# Altium PCB OSD19001_BRK_X2.PcbDoc (part 1 of 2)
Units mil, origin at the board's own origin, x right, y up, seen from the top; angles counter-clockwise.
Board outline 1800 x 3000 mil, 4 copper layers (Top Layer, L2 PLANE, L3 PLANE, Bottom Layer), stack 59.2 mil thick; 162 components, 155 nets, 549 pads, 163 vias.
Unrouted connection lines stored in the file: 111.
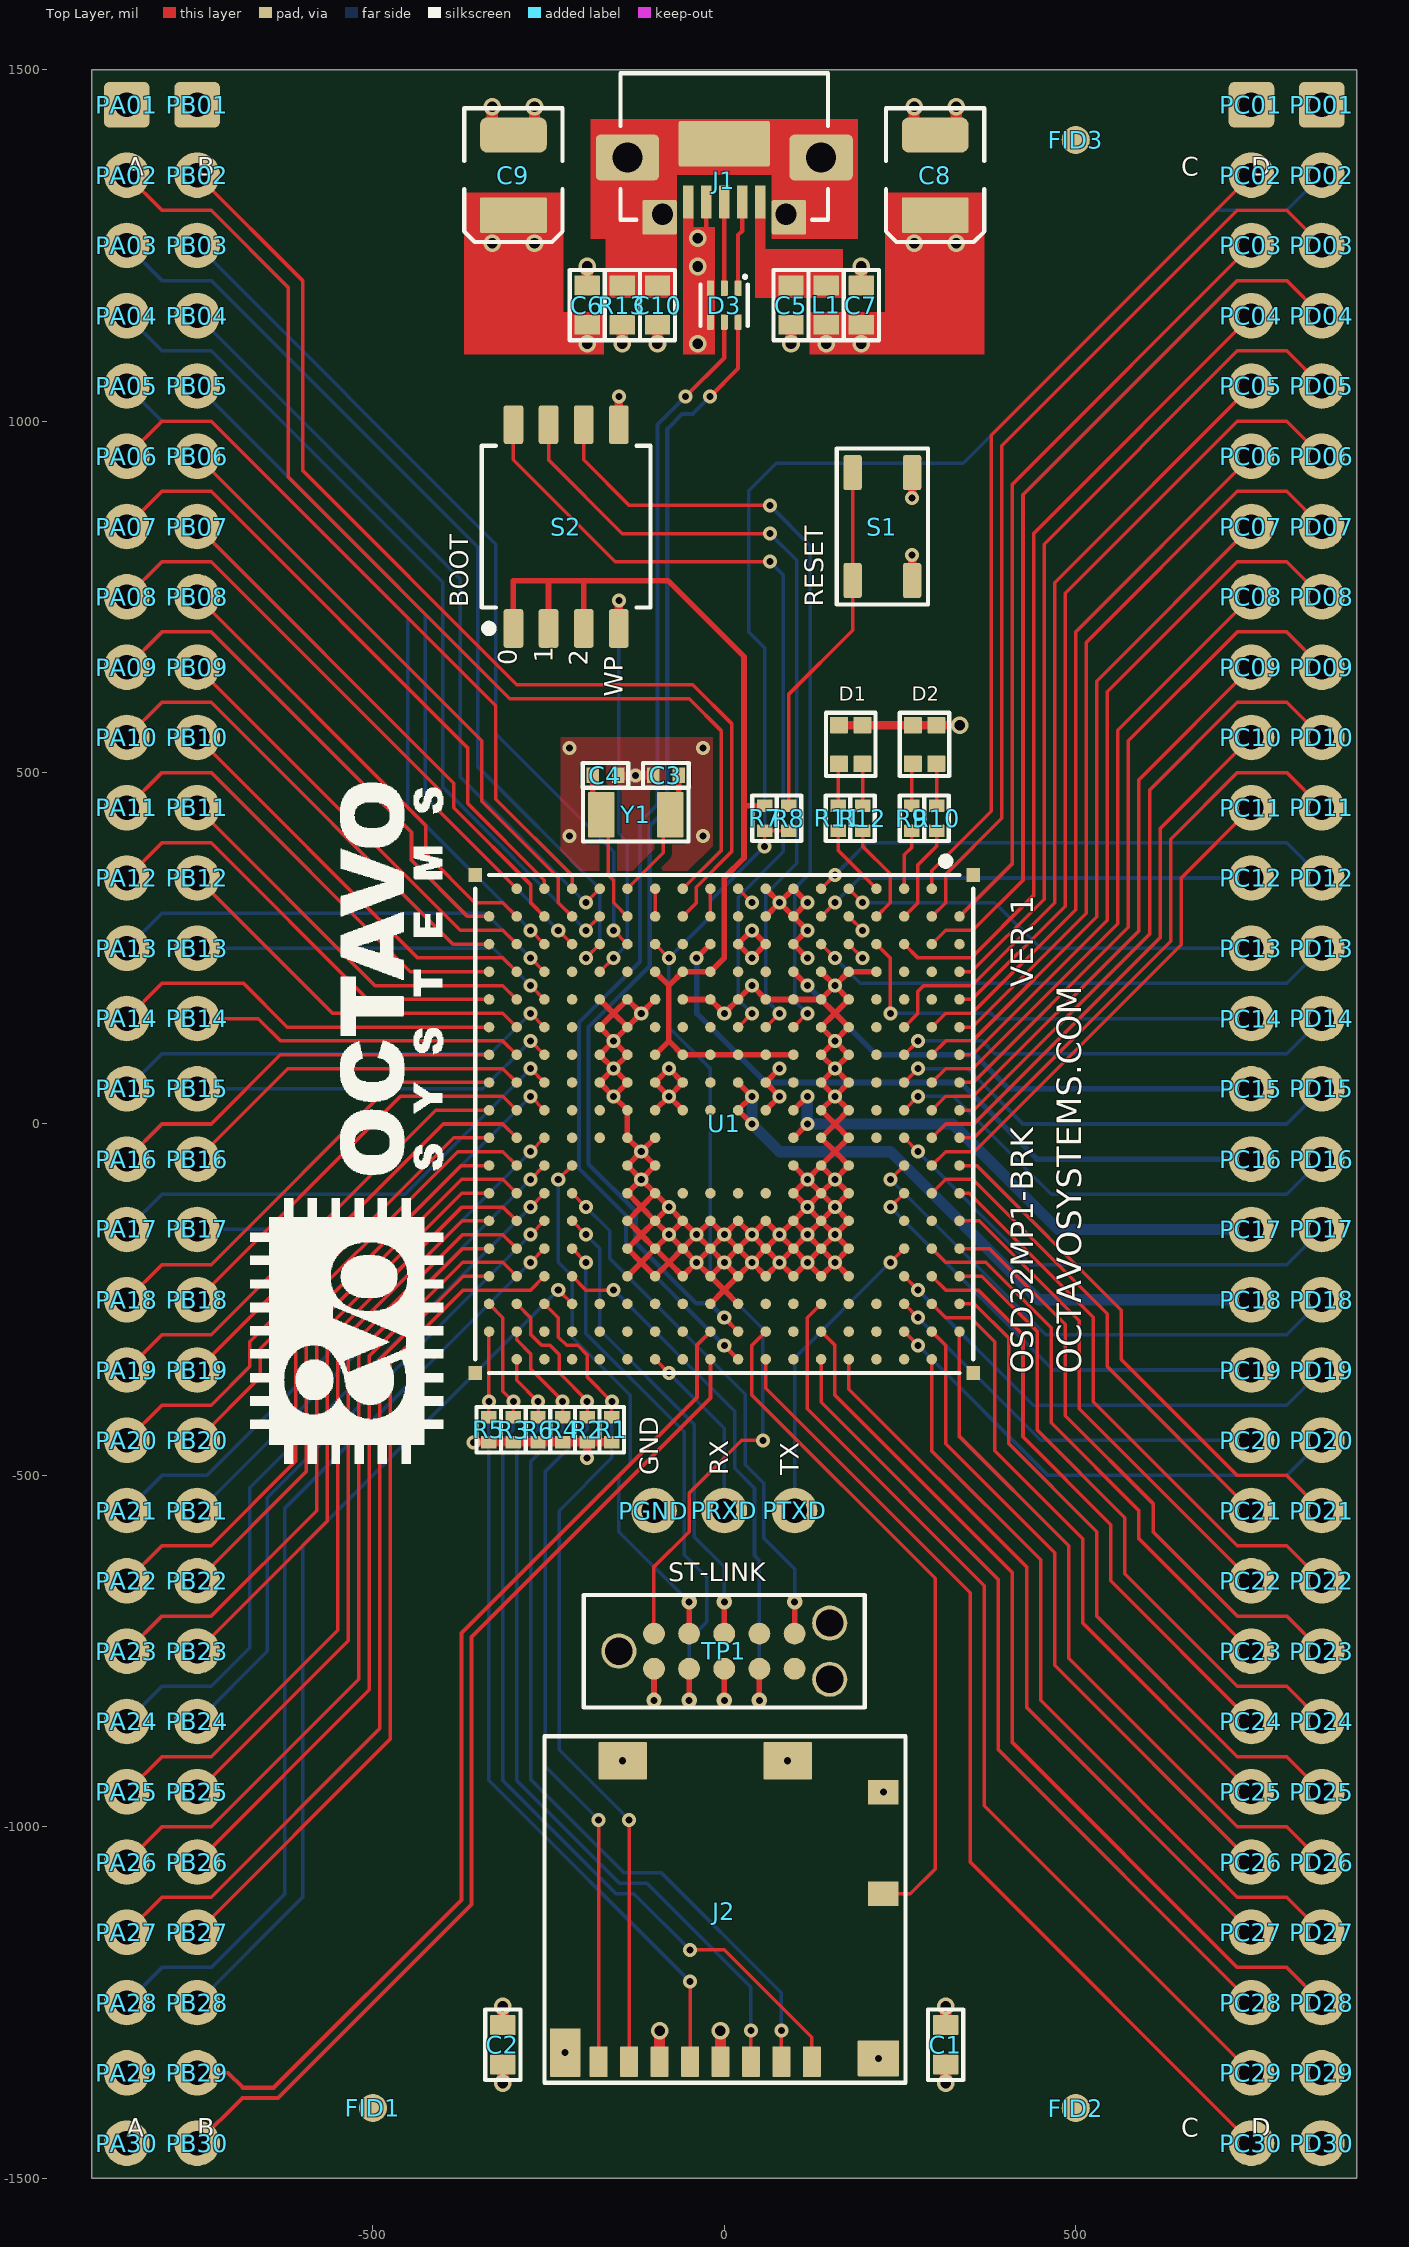
[diagram p0: Top Layer view]
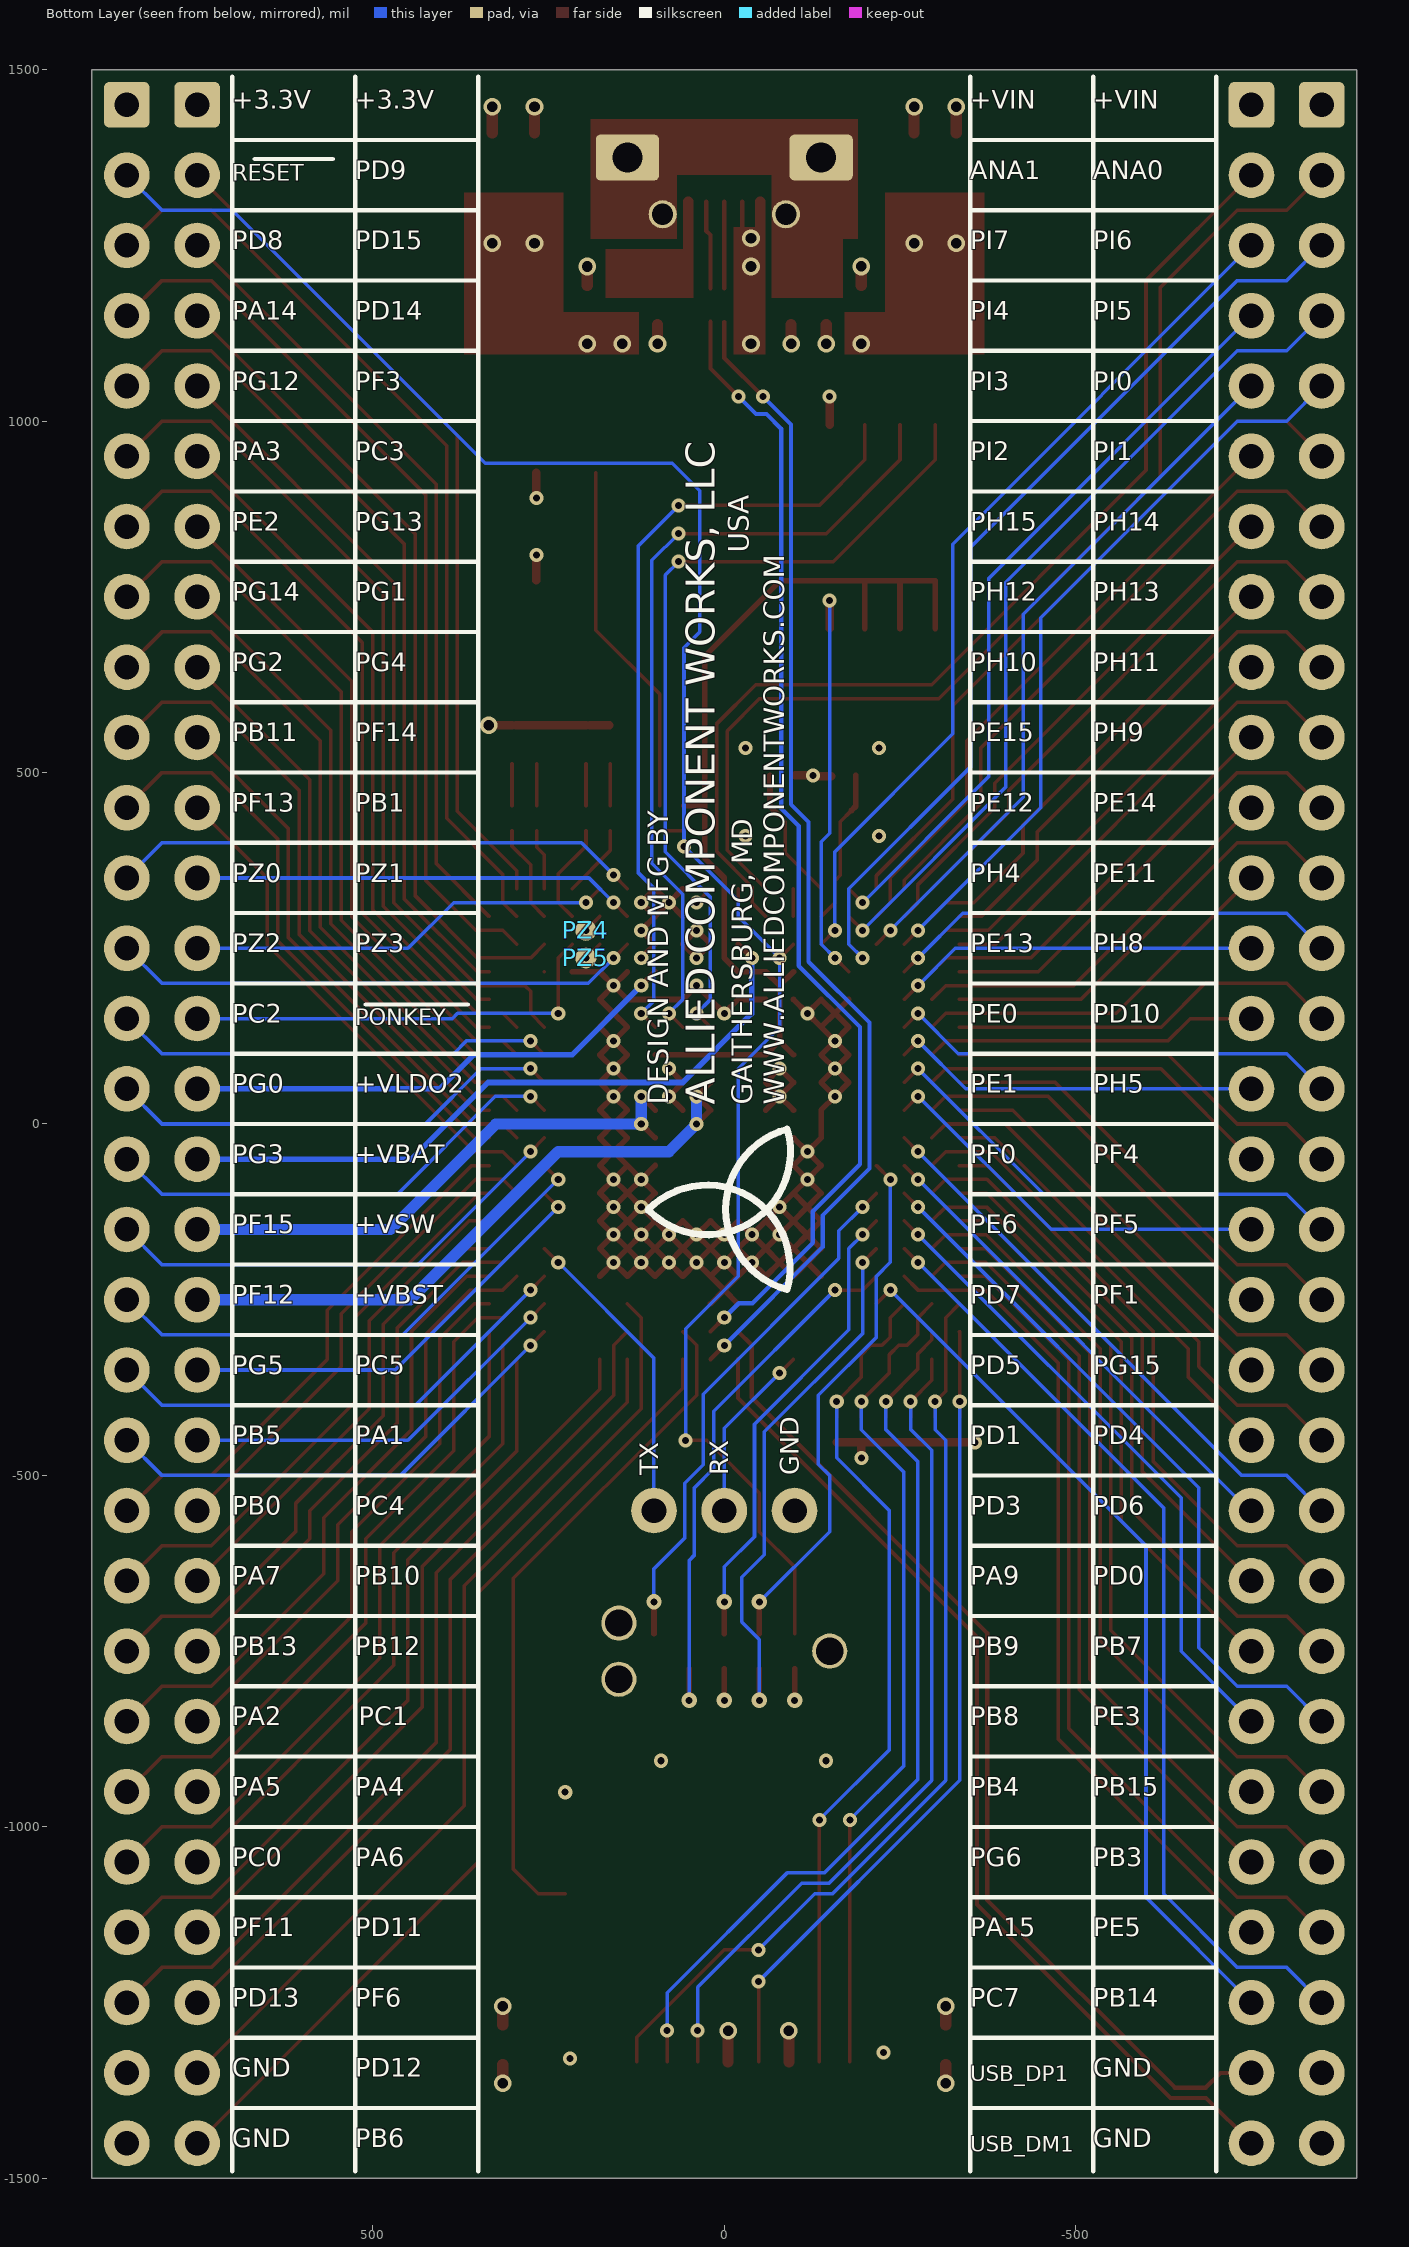
[diagram p1: Bottom Layer view, seen from below]
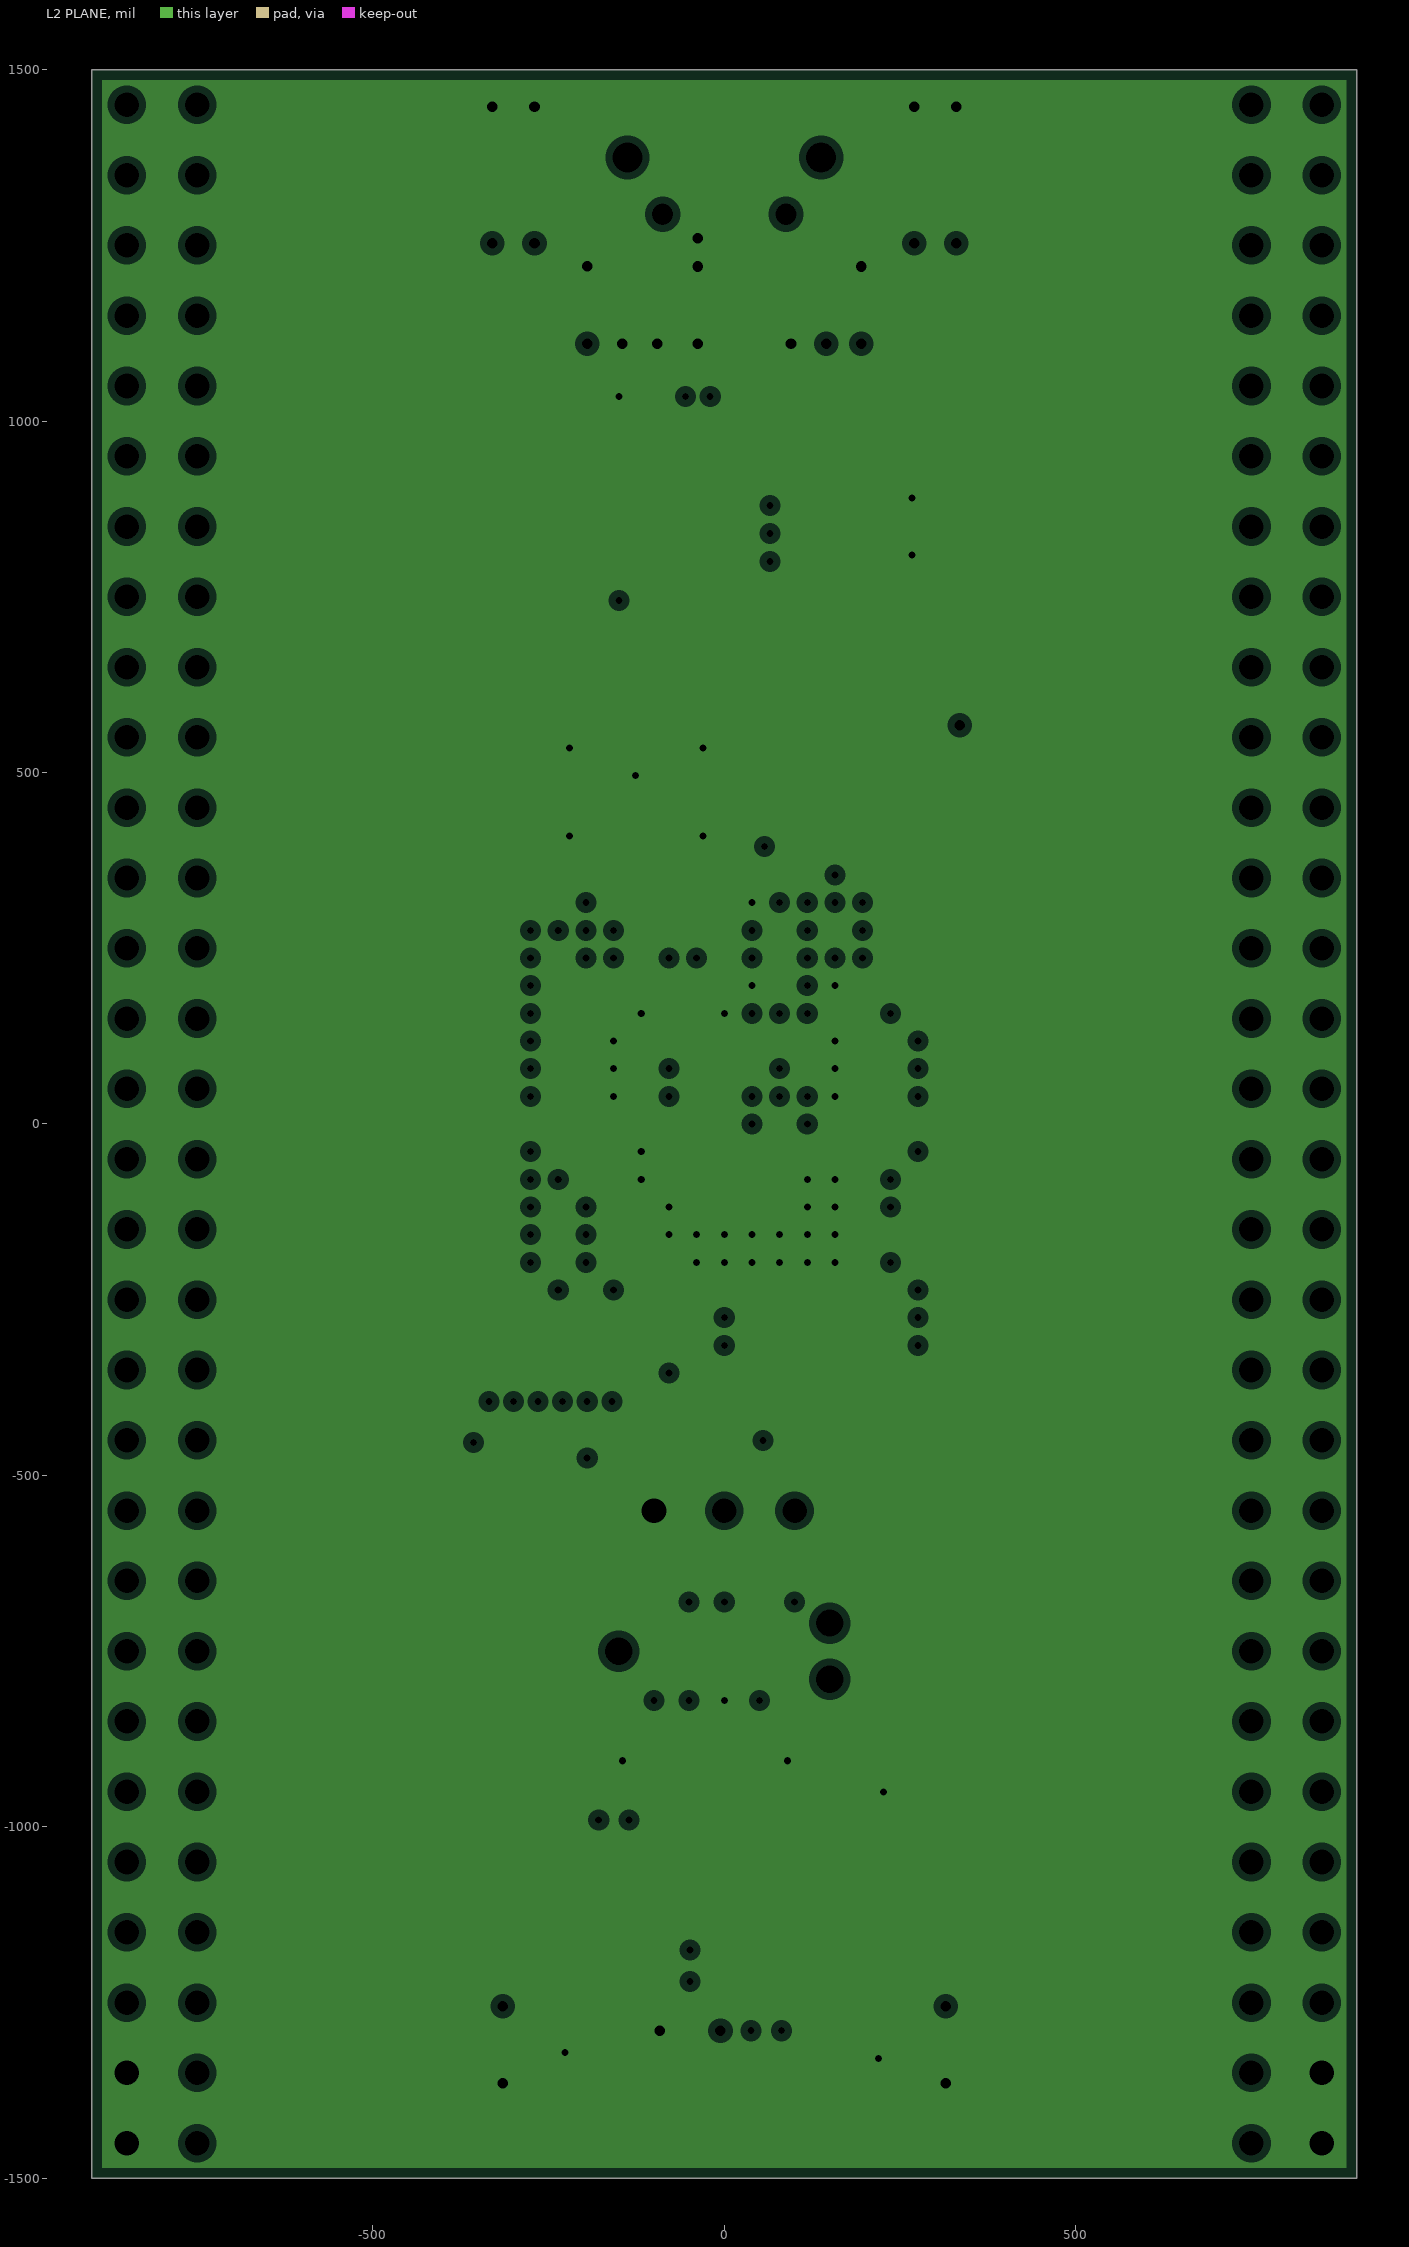
[diagram p2: L2 PLANE, clearances drawn from the general rule]
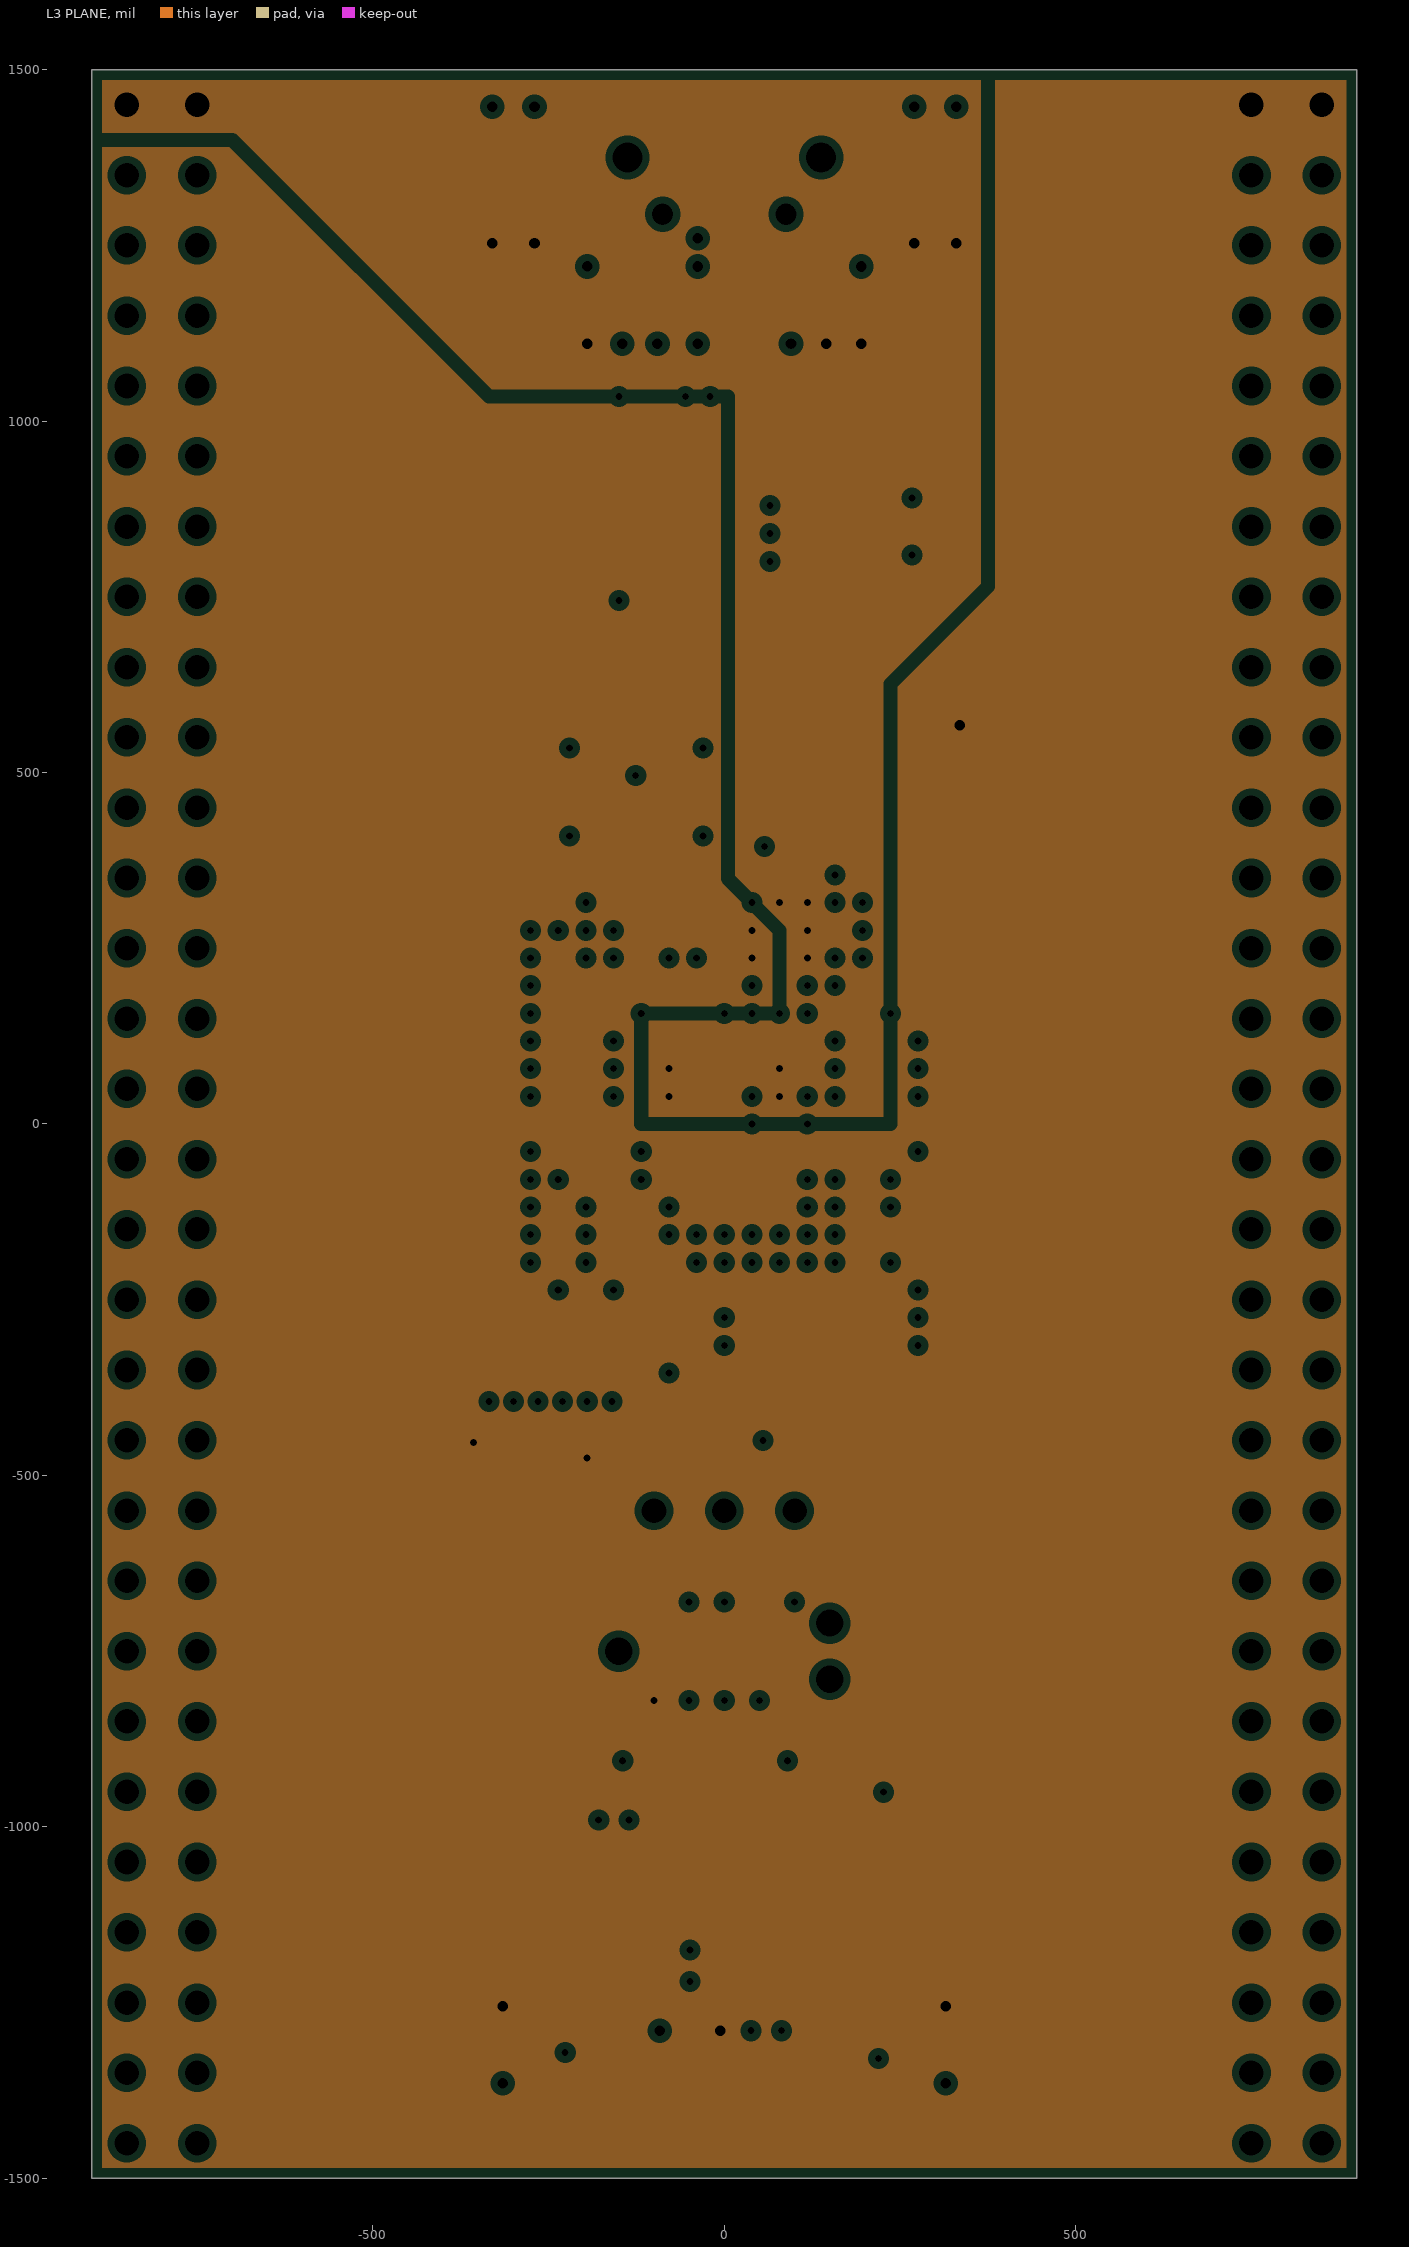
[diagram p3: L3 PLANE, clearances drawn from the general rule]

## Layer stack, top to bottom
Top Solder: solder mask 0.7, Solder Resist, Dk 3.5
Top Layer: signal copper 1.4
Dielectric 1: core 8, IPC-4101/126, Dk 4.2
L2 PLANE: plane copper 0.7, net GND
Dielectric 2: prepreg 39, IPC-4101/126, Dk 4.2
L3 PLANE: plane copper 0.7, net (Multiple Nets)
Dielectric 3: core 8, IPC-4101/126, Dk 4.2
Bottom Layer: signal copper 1.4
Bottom Solder: solder mask 0.7, Solder Resist, Dk 3.5

## Board outline
-900,-1500 900,-1500 900,1500 -900,1500

## Design rules (kind name [scope] priority, off if disabled: settings)
Clearance Polygon [All vs InPoly] p1: gap=10 ignorepadtopadclearanceinfootprint=FALSE
Clearance [All] p2: gap=5 ignorepadtopadclearanceinfootprint=FALSE
DiffPairsRouting [All] p1: maxlimit=200 minlimit=5 mostfreqgap=8 toplayer_minwidth=5 toplayer_maxwidth=12 toplayer_prefwidth=5 bottomlayer_minwidth=5 bottomlayer_maxwidth=12 bottomlayer_prefwidth=5 maxuncoupledlength=500
HoleSize [All] p1: absolutevalues=TRUE maxlimit=250 minlimit=4 maxpercent=80.000 minpercent=20.000
MinimumSolderMaskSliver [All] p1: minsoldermaskwidth=0
PlaneClearance [All] p1: clearance=10
PlaneConnect [IsPad] p1: planeconnectstyle=Direct reliefexpansion=7 reliefentries=4 reliefconductorwidth=10 reliefairgap=5
PlaneConnect Vias [All] p2: planeconnectstyle=Direct reliefexpansion=20 reliefentries=4 reliefconductorwidth=10 reliefairgap=10
PolygonConnect [All] p1: connectstyle=Direct reliefconductorwidth=15 reliefentries=4 polygonreliefangle="45 Angle" airgapwidth=15
RoutingVias [All] p1: holewidth=6 width=15 viastyle="Through Hole" minholewidth=6 minwidth=15 maxholewidth=50 maxwidth=80
SilkToSilkClearance [All] p1: silktosilkclearance=0
SilkToSolderMaskClearance SilkscreenOverComponentPads [IsPad] p1: minsilkscreentomaskgap=0 clearancetoexposedcopper=TRUE
SolderMaskExpansion ViaTenting [IsVia] p1: expansion=-50 istentingtop=FALSE
SolderMaskExpansion [All] p2: expansion=2 istentingtop=FALSE
Width [All] p1: maxlimit=500 minlimit=5 preferedwidth=6
23 further rules are at their usual default settings.

## Classes and differential pairs
component class SH_OSD19001_USB: C5 C6 C7 C8 C9 C10 D3 J1 L1 R13
component class SH_OSD19001_CORE: C1 C2 C3 C4 FID1 FID2 FID3 R7 R8 S1 S2 TP1 Y1
component class SH_OSD19001_BREAKOUTS: D1 D2 J2 PA01 PA02 PA03 PA04 PA05 PA06 PA07 PA08 PA09 PA10 PA11 PA12 PA13 PA14 PA15 PA16 PA17 PA18 PA19 PA20 PA21 PA22 PA23 PA24 PA25 PA26 PA27 PA28 PA29 PA30 PB01 PB02 PB03 PB04 PB05 PB06 PB07 PB08 PB09 PB10 PB11 PB12 PB13 PB14 PB15 PB16 PB17 PB18 PB19 PB20 PB21 PB22 PB23 PB24 PB25 PB26 PB27 PB28 PB29 PB30 PC01 PC02 PC03 PC04 PC05 PC06 PC07 PC08 PC09 PC10 PC11 PC12 PC13 PC14 PC15 PC16 PC17 PC18 PC19 PC20 PC21 PC22 PC23 PC24 PC25 PC26 PC27 PC28 PC29 PC30 PD01 PD02 PD03 PD04 PD05 PD06 PD07 PD08 PD09 PD10 PD11 PD12 PD13 PD14 PD15 PD16 PD17 PD18 PD19 PD20 PD21 PD22 PD23 PD24 PD25 PD26 PD27 PD28 PD29 PD30 PGND PRXD PTXD PZ4 PZ5 R1 R2 R3 R4 R5 R6 R9 R10 R11 R12 U1 U?
differential pair USB2_D: +USB2_D_P -USB2_D_N
differential pair USB1_D: +USB1_D_P -USB1_D_N

## Components (designator, comment, footprint, x,y, rotation, side; value= is the part's Value field where it differs from the comment)
C1 "0.22uF" LP_0603_HIGH#1 315,-1310 r270 top
C2 "0.22uF" LP_0603_HIGH#1 -315,-1310 r270 top
C3 "12pF" LP_0402_HIGH -83,496 r180 top
C4 "12pF" LP_0402_HIGH -169,496 r0 top
C5 "0.22uF" LP_0603_HIGH#2 95,1165 r90 top
C6 "0.22uF" LP_0603_HIGH#2 -195,1165 r270 top
C7 "0.22uF" LP_0603_HIGH#2 195,1165 r270 top
C8 "10uF" LP_EIAB 300,1350 r180 top
C9 "10uF" LP_EIAB -300,1350 r180 top
C10 "0.22uF" LP_0603_HIGH#2 -95,1165 r90 top
D1 "150066SV74000" WURTH_DUAL_0606 180,540 r90 top
D2 "150066SV74000" WURTH_DUAL_0606 285,540 r90 top
D3 "ECMF02-2AMX6" DFN6_6L_ST 0,1165 r270 top
FID1 "FID" FID_ROUND_40_TOP -500,-1400 r90 top
FID2 "FID" FID_ROUND_40_TOP 500,-1400 r90 top
FID3 "FID" FID_ROUND_40_TOP 500,1400 r90 top
J1 "UJ2-MIBH2-4-SMT" CUI_UJ2-MIBH2-4-SMT 0,1375 r0 top
J2 "104031-0811" MOLEX_104031-0811 0,-1120 r0 top locked
L1 "MPZ1608S102ATA00" LP_0603_IND 145,1165 r270 top
PA01 "TP" LP_TESTPOINT_TH#1 -850,1450 r0 top
PA02 "TP" LP_TESTPOINT_TH#2 -850,1350 r90 top
PA03 "TP" LP_TESTPOINT_TH#2 -850,1250 r90 top
PA04 "TP" LP_TESTPOINT_TH#2 -850,1150 r90 top
PA05 "TP" LP_TESTPOINT_TH#2 -850,1050 r90 top
PA06 "TP" LP_TESTPOINT_TH#2 -850,950 r90 top
PA07 "TP" LP_TESTPOINT_TH#2 -850,850 r90 top
PA08 "TP" LP_TESTPOINT_TH#2 -850,750 r90 top
PA09 "TP" LP_TESTPOINT_TH#2 -850,650 r90 top
PA10 "TP" LP_TESTPOINT_TH#2 -850,550 r90 top
PA11 "TP" LP_TESTPOINT_TH#2 -850,450 r0 top
PA12 "TP" LP_TESTPOINT_TH#2 -850,350 r90 top
PA13 "TP" LP_TESTPOINT_TH#2 -850,250 r90 top
PA14 "TP" LP_TESTPOINT_TH#2 -850,150 r90 top
PA15 "TP" LP_TESTPOINT_TH#2 -850,50 r90 top
PA16 "TP" LP_TESTPOINT_TH#2 -850,-50 r90 top
PA17 "TP" LP_TESTPOINT_TH#2 -850,-150 r90 top
PA18 "TP" LP_TESTPOINT_TH#2 -850,-250 r90 top
PA19 "TP" LP_TESTPOINT_TH#2 -850,-350 r90 top
PA20 "TP" LP_TESTPOINT_TH#2 -850,-450 r90 top
PA21 "TP" LP_TESTPOINT_TH#2 -850,-550 r0 top
PA22 "TP" LP_TESTPOINT_TH#2 -850,-650 r90 top
PA23 "TP" LP_TESTPOINT_TH#2 -850,-750 r90 top
PA24 "TP" LP_TESTPOINT_TH#2 -850,-850 r90 top
PA25 "TP" LP_TESTPOINT_TH#2 -850,-950 r90 top
PA26 "TP" LP_TESTPOINT_TH#2 -850,-1050 r90 top
PA27 "TP" LP_TESTPOINT_TH#2 -850,-1150 r90 top
PA28 "TP" LP_TESTPOINT_TH#2 -850,-1250 r90 top
PA29 "TP" LP_TESTPOINT_TH#2 -850,-1350 r90 top
PA30 "TP" LP_TESTPOINT_TH#2 -850,-1450 r90 top
PB01 "TP" LP_TESTPOINT_TH#1 -750,1450 r0 top
PB02 "TP" LP_TESTPOINT_TH#2 -750,1350 r90 top
PB03 "TP" LP_TESTPOINT_TH#2 -750,1250 r90 top
PB04 "TP" LP_TESTPOINT_TH#2 -750,1150 r90 top
PB05 "TP" LP_TESTPOINT_TH#2 -750,1050 r90 top
PB06 "TP" LP_TESTPOINT_TH#2 -750,950 r90 top
PB07 "TP" LP_TESTPOINT_TH#2 -750,850 r90 top
PB08 "TP" LP_TESTPOINT_TH#2 -750,750 r90 top
PB09 "TP" LP_TESTPOINT_TH#2 -750,650 r90 top
PB10 "TP" LP_TESTPOINT_TH#2 -750,550 r90 top
PB11 "TP" LP_TESTPOINT_TH#2 -750,450 r0 top
PB12 "TP" LP_TESTPOINT_TH#2 -750,350 r90 top
PB13 "TP" LP_TESTPOINT_TH#2 -750,250 r90 top
PB14 "TP" LP_TESTPOINT_TH#2 -750,150 r90 top
PB15 "TP" LP_TESTPOINT_TH#2 -750,50 r90 top
PB16 "TP" LP_TESTPOINT_TH#2 -750,-50 r90 top
PB17 "TP" LP_TESTPOINT_TH#2 -750,-150 r90 top
PB18 "TP" LP_TESTPOINT_TH#2 -750,-250 r90 top
PB19 "TP" LP_TESTPOINT_TH#2 -750,-350 r90 top
PB20 "TP" LP_TESTPOINT_TH#2 -750,-450 r90 top
PB21 "TP" LP_TESTPOINT_TH#2 -750,-550 r0 top
PB22 "TP" LP_TESTPOINT_TH#2 -750,-650 r90 top
PB23 "TP" LP_TESTPOINT_TH#2 -750,-750 r90 top
PB24 "TP" LP_TESTPOINT_TH#2 -750,-850 r90 top
PB25 "TP" LP_TESTPOINT_TH#2 -750,-950 r90 top
PB26 "TP" LP_TESTPOINT_TH#2 -750,-1050 r90 top
PB27 "TP" LP_TESTPOINT_TH#2 -750,-1150 r90 top
PB28 "TP" LP_TESTPOINT_TH#2 -750,-1250 r90 top
PB29 "TP" LP_TESTPOINT_TH#2 -750,-1350 r90 top
PB30 "TP" LP_TESTPOINT_TH#2 -750,-1450 r90 top
PC01 "TP" LP_TESTPOINT_TH#1 750,1450 r0 top
PC02 "TP" LP_TESTPOINT_TH#2 750,1350 r90 top
PC03 "TP" LP_TESTPOINT_TH#2 750,1250 r90 top
PC04 "TP" LP_TESTPOINT_TH#2 750,1150 r90 top
PC05 "TP" LP_TESTPOINT_TH#2 750,1050 r90 top
PC06 "TP" LP_TESTPOINT_TH#2 750,950 r90 top
PC07 "TP" LP_TESTPOINT_TH#2 750,850 r90 top
PC08 "TP" LP_TESTPOINT_TH#2 750,750 r90 top
PC09 "TP" LP_TESTPOINT_TH#2 750,650 r90 top
PC10 "TP" LP_TESTPOINT_TH#2 750,550 r90 top
PC11 "TP" LP_TESTPOINT_TH#2 750,450 r0 top
PC12 "TP" LP_TESTPOINT_TH#2 750,350 r90 top
PC13 "TP" LP_TESTPOINT_TH#2 750,250 r90 top
PC14 "TP" LP_TESTPOINT_TH#2 750,150 r90 top
PC15 "TP" LP_TESTPOINT_TH#2 750,50 r90 top
PC16 "TP" LP_TESTPOINT_TH#2 750,-50 r90 top
PC17 "TP" LP_TESTPOINT_TH#2 750,-150 r90 top
PC18 "TP" LP_TESTPOINT_TH#2 750,-250 r90 top
PC19 "TP" LP_TESTPOINT_TH#2 750,-350 r90 top
PC20 "TP" LP_TESTPOINT_TH#2 750,-450 r90 top
PC21 "TP" LP_TESTPOINT_TH#2 750,-550 r0 top
PC22 "TP" LP_TESTPOINT_TH#2 750,-650 r90 top
PC23 "TP" LP_TESTPOINT_TH#2 750,-750 r90 top
PC24 "TP" LP_TESTPOINT_TH#2 750,-850 r90 top
PC25 "TP" LP_TESTPOINT_TH#2 750,-950 r90 top
PC26 "TP" LP_TESTPOINT_TH#2 750,-1050 r90 top
PC27 "TP" LP_TESTPOINT_TH#2 750,-1150 r90 top
PC28 "TP" LP_TESTPOINT_TH#2 750,-1250 r90 top
PC29 "TP" LP_TESTPOINT_TH#2 750,-1350 r90 top
PC30 "TP" LP_TESTPOINT_TH#2 750,-1450 r90 top
PD01 "TP" LP_TESTPOINT_TH#1 850,1450 r0 top
PD02 "TP" LP_TESTPOINT_TH#2 850,1350 r90 top
PD03 "TP" LP_TESTPOINT_TH#2 850,1250 r90 top
PD04 "TP" LP_TESTPOINT_TH#2 850,1150 r90 top
PD05 "TP" LP_TESTPOINT_TH#2 850,1050 r90 top
PD06 "TP" LP_TESTPOINT_TH#2 850,950 r90 top
PD07 "TP" LP_TESTPOINT_TH#2 850,850 r90 top
PD08 "TP" LP_TESTPOINT_TH#2 850,750 r90 top
PD09 "TP" LP_TESTPOINT_TH#2 850,650 r90 top
PD10 "TP" LP_TESTPOINT_TH#2 850,550 r90 top
PD11 "TP" LP_TESTPOINT_TH#2 850,450 r0 top
PD12 "TP" LP_TESTPOINT_TH#2 850,350 r90 top
PD13 "TP" LP_TESTPOINT_TH#2 850,250 r90 top
PD14 "TP" LP_TESTPOINT_TH#2 850,150 r90 top
PD15 "TP" LP_TESTPOINT_TH#2 850,50 r90 top
PD16 "TP" LP_TESTPOINT_TH#2 850,-50 r90 top
PD17 "TP" LP_TESTPOINT_TH#2 850,-150 r90 top
PD18 "TP" LP_TESTPOINT_TH#2 850,-250 r90 top
PD19 "TP" LP_TESTPOINT_TH#2 850,-350 r90 top
PD20 "TP" LP_TESTPOINT_TH#2 850,-450 r90 top
PD21 "TP" LP_TESTPOINT_TH#2 850,-550 r0 top
PD22 "TP" LP_TESTPOINT_TH#2 850,-650 r90 top
PD23 "TP" LP_TESTPOINT_TH#2 850,-750 r90 top
PD24 "TP" LP_TESTPOINT_TH#2 850,-850 r90 top
PD25 "TP" LP_TESTPOINT_TH#2 850,-950 r90 top
PD26 "TP" LP_TESTPOINT_TH#2 850,-1050 r90 top
PD27 "TP" LP_TESTPOINT_TH#2 850,-1150 r90 top
PD28 "TP" LP_TESTPOINT_TH#2 850,-1250 r90 top
PD29 "TP" LP_TESTPOINT_TH#2 850,-1350 r90 top
PD30 "TP" LP_TESTPOINT_TH#2 850,-1450 r90 top
PGND "TP" LP_TESTPOINT_TH#2 -100,-550 r270 top locked
PRXD "TP" LP_TESTPOINT_TH#2 0,-550 r270 top locked
PTXD "TP" LP_TESTPOINT_TH#2 100,-550 r270 top locked
PZ4 "TP" LP_TESTPOINT_SMT 196.85,275.59 r90 bottom
PZ5 "TP" LP_TESTPOINT_SMT 196.85,236.22 r90 bottom
R1 "10K" LP_0402_LOW -160,-435 r270 top
R2 "10K" LP_0402_LOW -195,-435 r270 top
R3 "10K" LP_0402_LOW -300,-435 r270 top
R4 "10K" LP_0402_LOW -230,-435 r270 top
R5 "10K" LP_0402_LOW -335,-435 r270 top
R6 "10K" LP_0402_LOW -265,-435 r270 top
R7 "10K" LP_0402_LOW 57.31,435 r90 top
R8 "330" LP_0402_LOW 92,435 r270 top
R9 "330" LP_0402_LOW 267,435 r90 top
R10 "330" LP_0402_LOW 302,435 r90 top
R11 "330" LP_0402_LOW 162,435 r90 top
R12 "330" LP_0402_LOW 196.73,435 r90 top
R13 "12K" LP_0603_LOW -145,1165 r90 top
S1 "PTS810" C&K_PTS810 225,850 r90 top locked
S2 "TDA04H0SB1R" C&K_TDA04 -225,850 r0 top locked
TP1 "TC2050-IDC-NL" TC2050_SITE_NL 0,-750 r0 top locked
U1 "OSD32MP157C-512M-BAA" BGA_OCTAVO_SIP_OSD32MP157C 0,0 r270 top locked
Y1 "32.768KHz" NDK_CRYSTAL_1.5X3.2 -126,440 r0 top

## Footprints (in the part's own frame and the unit in brackets; to place one, negate y for a bottom-side part, rotate by r counter-clockwise, add the part's x,y. Pads: shape width x height; smd on the part's side, far side on the other; paste and mask are expansions set on the pad)
BGA_OCTAVO_SIP_OSD32MP157C [mm] "BGA For Octavo SIP"
  rect 0.5x0.5 smd paste-0.254: 0(-9,9) 0(-9,-9) 0(9,9) 0(9,-9)
  round 0.381 smd paste+0.025: A2(-7.5,8.5) A3(-6.5,8.5) A4(-5.5,8.5) A5(-4.5,8.5) A6(-3.5,8.5) A7(-2.5,8.5) A8(-1.5,8.5) A9(-0.5,8.5) A10(0.5,8.5) A11(1.5,8.5) A12(2.5,8.5) A13(3.5,8.5) A14(4.5,8.5) A15(5.5,8.5) A16(6.5,8.5) A17(7.5,8.5) B1(-8.5,7.5) B2(-7.5,7.5) B3(-6.5,7.5) B4(-5.5,7.5) B5(-4.5,7.5) B6(-3.5,7.5) B7(-2.5,7.5) B8(-1.5,7.5) B9(-0.5,7.5) B10(0.5,7.5) B11(1.5,7.5) B12(2.5,7.5) B13(3.5,7.5) B14(4.5,7.5) B15(5.5,7.5) B16(6.5,7.5) B17(7.5,7.5) B18(8.5,7.5) C1(-8.5,6.5) C2(-7.5,6.5) C3(-6.5,6.5) C4(-5.5,6.5) C5(-4.5,6.5) C6(-3.5,6.5) C7(-2.5,6.5) C8(-1.5,6.5) C9(-0.5,6.5) C10(0.5,6.5) C11(1.5,6.5) C12(2.5,6.5) C13(3.5,6.5) C14(4.5,6.5) C15(5.5,6.5) C16(6.5,6.5) C17(7.5,6.5) C18(8.5,6.5) D1(-8.5,5.5) D2(-7.5,5.5) D3(-6.5,5.5) D4(-5.5,5.5) D5(-4.5,5.5) D6(-3.5,5.5) D7(-2.5,5.5) D8(-1.5,5.5) D9(-0.5,5.5) D10(0.5,5.5) D16(6.5,5.5) D17(7.5,5.5) D18(8.5,5.5) E1(-8.5,4.5) E2(-7.5,4.5) E3(-6.5,4.5) E4(-5.5,4.5) E5(-4.5,4.5) E6(-3.5,4.5) E7(-2.5,4.5) E8(-1.5,4.5) E9(-0.5,4.5) E10(0.5,4.5) E11(1.5,4.5) E12(2.5,4.5) E13(3.5,4.5) E14(4.5,4.5) E15(5.5,4.5) E16(6.5,4.5) E17(7.5,4.5) E18(8.5,4.5) F1(-8.5,3.5) F2(-7.5,3.5) F3(-6.5,3.5) F4(-5.5,3.5) F5(-4.5,3.5) F6(-3.5,3.5) F7(-2.5,3.5) F8(-1.5,3.5) F9(-0.5,3.5) F10(0.5,3.5) F11(1.5,3.5) F12(2.5,3.5) F13(3.5,3.5) F14(4.5,3.5) F15(5.5,3.5) F16(6.5,3.5) F17(7.5,3.5) F18(8.5,3.5) G1(-8.5,2.5) G2(-7.5,2.5) G3(-6.5,2.5) G4(-5.5,2.5) G5(-4.5,2.5) G6(-3.5,2.5) G7(-2.5,2.5) G8(-1.5,2.5) G9(-0.5,2.5) G10(0.5,2.5) G11(1.5,2.5) G12(2.5,2.5) G13(3.5,2.5) G14(4.5,2.5) G15(5.5,2.5) G16(6.5,2.5) G17(7.5,2.5) G18(8.5,2.5) H1(-8.5,1.5) H2(-7.5,1.5) H3(-6.5,1.5) H4(-5.5,1.5) H5(-4.5,1.5) H6(-3.5,1.5) H7(-2.5,1.5) H8(-1.5,1.5) H9(-0.5,1.5) H12(2.5,1.5) H13(3.5,1.5) H14(4.5,1.5) H15(5.5,1.5) H16(6.5,1.5) H17(7.5,1.5) H18(8.5,1.5) J1(-8.5,0.5) J2(-7.5,0.5) J3(-6.5,0.5) J4(-5.5,0.5) J5(-4.5,0.5) J6(-3.5,0.5) J7(-2.5,0.5) J8(-1.5,0.5) J9(-0.5,0.5) J12(2.5,0.5) J13(3.5,0.5) J14(4.5,0.5) J15(5.5,0.5) J16(6.5,0.5) J17(7.5,0.5) J18(8.5,0.5) K1(-8.5,-0.5) K2(-7.5,-0.5) K3(-6.5,-0.5) K4(-5.5,-0.5) K5(-4.5,-0.5) K6(-3.5,-0.5) K7(-2.5,-0.5) K8(-1.5,-0.5) K9(-0.5,-0.5) K12(2.5,-0.5) K13(3.5,-0.5) K14(4.5,-0.5) K15(5.5,-0.5) K16(6.5,-0.5) K17(7.5,-0.5) K18(8.5,-0.5) L1(-8.5,-1.5) L2(-7.5,-1.5) L3(-6.5,-1.5) L4(-5.5,-1.5) L5(-4.5,-1.5) L6(-3.5,-1.5) L7(-2.5,-1.5) L8(-1.5,-1.5) L9(-0.5,-1.5) L12(2.5,-1.5) L13(3.5,-1.5) L14(4.5,-1.5) L15(5.5,-1.5) L16(6.5,-1.5) L17(7.5,-1.5) L18(8.5,-1.5) M1(-8.5,-2.5) M2(-7.5,-2.5) M3(-6.5,-2.5) M4(-5.5,-2.5) M5(-4.5,-2.5) M6(-3.5,-2.5) M7(-2.5,-2.5) M8(-1.5,-2.5) M9(-0.5,-2.5) M10(0.5,-2.5) M11(1.5,-2.5) M12(2.5,-2.5) M13(3.5,-2.5) M14(4.5,-2.5) M15(5.5,-2.5) M16(6.5,-2.5) M17(7.5,-2.5) M18(8.5,-2.5) N1(-8.5,-3.5) N2(-7.5,-3.5) N3(-6.5,-3.5) N4(-5.5,-3.5) N5(-4.5,-3.5) N6(-3.5,-3.5) N7(-2.5,-3.5) N8(-1.5,-3.5) N9(-0.5,-3.5) N10(0.5,-3.5) N11(1.5,-3.5) N12(2.5,-3.5) N13(3.5,-3.5) N14(4.5,-3.5) N15(5.5,-3.5) N16(6.5,-3.5) N17(7.5,-3.5) N18(8.5,-3.5) P1(-8.5,-4.5) P2(-7.5,-4.5) P3(-6.5,-4.5) P4(-5.5,-4.5) P5(-4.5,-4.5) P6(-3.5,-4.5) P7(-2.5,-4.5) P8(-1.5,-4.5) P9(-0.5,-4.5) P10(0.5,-4.5) P16(6.5,-4.5) P17(7.5,-4.5) P18(8.5,-4.5) R1(-8.5,-5.5) R2(-7.5,-5.5) R3(-6.5,-5.5) R4(-5.5,-5.5) R5(-4.5,-5.5) R6(-3.5,-5.5) R7(-2.5,-5.5) R8(-1.5,-5.5) R9(-0.5,-5.5) R10(0.5,-5.5) R11(1.5,-5.5) R12(2.5,-5.5) R13(3.5,-5.5) R14(4.5,-5.5) R15(5.5,-5.5) R16(6.5,-5.5) R17(7.5,-5.5) R18(8.5,-5.5) T1(-8.5,-6.5) T2(-7.5,-6.5) T3(-6.5,-6.5) T4(-5.5,-6.5) T5(-4.5,-6.5) T6(-3.5,-6.5) T7(-2.5,-6.5) T8(-1.5,-6.5) T9(-0.5,-6.5) T10(0.5,-6.5) T11(1.5,-6.5) T12(2.5,-6.5) T13(3.5,-6.5) T14(4.5,-6.5) T15(5.5,-6.5) T16(6.5,-6.5) T17(7.5,-6.5) T18(8.5,-6.5) U1(-8.5,-7.5) U2(-7.5,-7.5) U3(-6.5,-7.5) U4(-5.5,-7.5) U5(-4.5,-7.5) U6(-3.5,-7.5) U7(-2.5,-7.5) U8(-1.5,-7.5) U9(-0.5,-7.5) U10(0.5,-7.5) U11(1.5,-7.5) U12(2.5,-7.5) U13(3.5,-7.5) U14(4.5,-7.5) U15(5.5,-7.5) U16(6.5,-7.5) U17(7.5,-7.5) U18(8.5,-7.5) V2(-7.5,-8.5) V3(-6.5,-8.5) V4(-5.5,-8.5) V5(-4.5,-8.5) V6(-3.5,-8.5) V7(-2.5,-8.5) V8(-1.5,-8.5) V9(-0.5,-8.5) V10(0.5,-8.5) V11(1.5,-8.5) V12(2.5,-8.5) V13(3.5,-8.5) V14(4.5,-8.5) V15(5.5,-8.5) V16(6.5,-8.5) V17(7.5,-8.5)
  silkscreen extent -9.63,-9 9,9, body extent -9,-9 9,9, height 2.3
C&K_PTS810 [mm] "Tact Switch"
  rrect25% 1.27x0.66 smd: 1(-1.95,1.075) 1(1.95,1.075) 2(-1.95,-1.075) 2(1.95,-1.075)
  silkscreen extent -2.82,-1.65 2.82,1.65, body extent -2.3,-1.6 2.3,1.6, height 2.5
C&K_TDA04 [mil] "SMT Dip Switch, 4 Position"
  rrect25% 28x55 smd: 1(-75,-145) 2(-25,-145) 3(25,-145) 4(75,-145) 5(75,145) 6(25,145) 7(-25,145) 8(-75,145)
  silkscreen extent -120,-150 120,115, body extent -122,-160 122,160, height 93
CUI_UJ2-MIBH2-4-SMT [mil] "Micro USB B"
  rrect10% 15x47 smd: 1(51.18,-62.99) 2(25.59,-62.99) 3(0,-62.99) 4(-25.59,-62.99) 5(-51.18,-62.99)
  rrect20% 90x65 hole 43: 6(-137.8,0) 6(137.8,0)
  rrect10% 49x49 smd mask+1: 6(-92,-85) 6(92,-85)
  round 40 hole 30 mask+0: 6(-87.6,-80.71) 6(87.6,-80.71)
  rrect10% 130x65 smd mask+1: 6(0,19.68)
  silkscreen extent -148,-89 148,120, body extent -148,-88 148,120, height 108
DFN6_6L_ST [mil] "DFN 6-Pin 1.7mm x 1.5mm"
  rrect25% 22x10 smd: 1(-24.02,19.68) 2(-24.02,0) 5(24.02,0) 6(24.02,19.68)
  rrect25% 22x10 smd mask+1: 3(-24.02,-19.68) 4(24.02,-19.68)
  silkscreen extent -42,-34 30,33, body extent -30,-33 30,33, height 20
FID_ROUND_40_TOP [mil] "40 Mil Round Fiducial, Top Side Only"
  round 40 smd: 1(0,0)
LP_0402_HIGH [mil] "0402 Footprint High Component"
  rrect5% 18x22 smd: 1(-18,0)
  rrect5% 18x22 smd mask+1: 2(18,0)
  silkscreen extent -32,-18 32,18, body extent -21,-11 21,11, height 20
LP_0402_LOW [mil] "0402 Footprint Low Component"
  rrect5% 18x22 smd: 1(-18,0) 2(18,0)
  silkscreen extent -32,-18 32,18, body extent -21,-11 21,11, height 10
LP_0603_HIGH#1 [mil] "0603 Footprint High Component"
  rrect5% 28x36 smd: 1(-28,0) 2(28,0)
  silkscreen extent -50,-25 50,25, body extent -33,-17 33,17, height 30
LP_0603_HIGH#2 [mil] "0603 Footprint High Component"
  rrect5% 28x36 smd: 1(-28,0)
  rrect5% 28x36 smd mask+1: 2(28,0)
  silkscreen extent -50,-25 50,25, body extent -33,-17 33,17, height 30
LP_0603_IND [mil] "0603 Footprint High Component"
  rrect5% 28x36 smd mask+1: 1(-28,0) 2(28,0)
  silkscreen extent -50,-25 50,25, body extent -33,-17 33,17, height 30
LP_0603_LOW [mil] "0603 Footprint Low Component"
  rrect5% 28x36 smd: 1(-28,0)
  rrect5% 28x36 smd mask+1: 2(28,0)
  silkscreen extent -50,-25 50,25, body extent -33,-17 33,17, height 15
LP_EIAB [mil] "EIA-B Case Capacitor"
  rrect5% 95x50 smd mask+1: 1(0,57)
  rrect40% 95x50 smd: 2(0,-57)
  silkscreen extent -70,-95 70,95, body extent -59,-73 59,73, height 83
LP_TESTPOINT_SMT [mil] "SMT Test Point"
  round 30 smd: 1(0,0)
LP_TESTPOINT_TH#1 [mil] "35 Mil Test Point Hole"
  rrect25% 65x65 / inner rrect25% 55x55 / far side rrect25% 65x65 hole 35: 1(0,0)
LP_TESTPOINT_TH#2 [mil] "35 Mil Test Point Hole"
  round 65 / inner round 55 / far side round 65 hole 35: 1(0,0)
MOLEX_104031-0811 [mm]
  rrect10% 0.65x1.1 smd paste+0.102: 1(3.163,-5.437) 2(2.063,-5.437) 3(0.962,-5.437) 4(-0.138,-5.437) 5(-1.237,-5.437) 6(-2.337,-5.437) 7(-3.437,-5.437) 8(-4.537,-5.437)
  rrect5% 1.1x1.75 smd paste+0.051: 9(-5.747,-5.11)
  rrect5% 1.75x1.35 smd paste+0.051: 9(-3.67,5.437) 9(2.29,5.437)
  rrect5% 1.5x1.3 smd paste+0.051: 9(5.573,-5.318)
  rrect5% 1.1x0.9 smd paste+0.051: 10(5.748,4.3) 11(5.748,0.63)
  silkscreen extent -6.5,-6.2 6.55,6.32, body extent -5.93,-9.75 6.02,5.62, height 1.55
NDK_CRYSTAL_1.5X3.2 [mil]
  rrect10% 38x65 smd paste-5: 1(-49.21,0) 2(49.21,0)
  silkscreen extent -75,-38 75,38, body extent -63,-30 63,30, height 31
TC2050_SITE_NL [mil]
  round 50 hole 39: 0(-150,0) 0(150,-40) 0(150,40)
  round 31 smd paste-39: 1(-100,-25) 2(-50,-25) 3(0,-25) 4(50,-25) 5(100,-25) 6(100,25) 7(50,25) 8(0,25) 9(-50,25) 10(-100,25)
  silkscreen extent -200,-80 200,80
WURTH_DUAL_0606 [mm] "R/G LED 0606 Package"
  rrect10% 0.6x0.65 smd: 1(-0.7,0.425) 2(-0.7,-0.425) 3(0.7,-0.425) 4(0.7,0.425)
  silkscreen extent -1.14,-0.89 1.14,0.9, body extent -0.8,-0.8 0.8,0.8, height 0.7

## Part data
C1 C2 C3 C4 C5 C6 C7 C10: library part CERCAP, Tolerance=10%, Voltage=25V
C8 C9: library part POLCAP, Tolerance=20%, Voltage=10V
D1 D2: library part LED_DUAL_0606_WURTH, "LED, Dual, 4-Wire, SMT", PartNumber=150066SV74000
D3: "USB Filter And ESD Protection", PartNumber=ECMF02-2AMX6
FID1 FID2 FID3: library part FIDUCIAL
J1: library part USB_MICRO_B, "USB Micro B Connetor", PartNumber=UJ2-MIBH2-4-SMT
J2: library part SD_CARD_SW, "Micro SD Connector, With CD Switch", PartNumber=104031-0811
L1: library part BEAD, CurrentRating=0.8A, Impedence=300, PartNumber=MPZ1608S102ATA00, Size=0603
PA01 PA02 PA03 PA04 PA05 PA06 PA07 PA08 PA09 PA10 PA11 PA12 PA13 PA14 PA15 PA16 PA17 PA18 PA19 PA20 PA21 PA22 PA23 PA24 PA25 PA26 PA27 PA28 PA29 PA30 PB01 PB02 PB03 PB04 PB05 PB06 PB07 PB08 PB09 PB10 PB11 PB12 PB13 PB14 PB15 PB16 PB17 PB18 PB19 PB20 PB21 PB22 PB23 PB24 PB25 PB26 PB27 PB28 PB29 PB30 PC01 PC02 PC03 PC04 PC05 PC06 PC07 PC08 PC09 PC10 PC11 PC12 PC13 PC14 PC15 PC16 PC17 PC18 PC19 PC20 PC21 PC22 PC23 PC24 PC25 PC26 PC27 PC28 PC29 PC30 PD01 PD02 PD03 PD04 PD05 PD06 PD07 PD08 PD09 PD10 PD11 PD12 PD13 PD14 PD15 PD16 PD17 PD18 PD19 PD20 PD21 PD22 PD23 PD24 PD25 PD26 PD27 PD28 PD29 PD30 PGND PRXD PTXD PZ4 PZ5: library part TEST_POINT
R1 R2 R3 R4 R5 R6 R7 R8 R9 R10 R11 R12 R13: library part RESISTOR, Power=0.1W, Tolerance=5%, Voltage=50V
S1: library part TACT_SWITCH, "SPST Tactile Switch, 2 Active Pins", PartNumber=PTS810
S2: library part DIP_SW_4, "Four Position DIP Switch", PartNumber=TDA04H0SB1R
TP1: library part TC2050, "Tag Connect Site, 10-Pin", PartNumber=TC2050-IDC-NL
U1: "Octavo ST Processor SIP", Manufacturer="Octavo Systems", ComponentLink1Description=TBD, ComponentLink1URL=http://TBD, PartNumber=OSD32MP157C-512M-BAA
Y1: library part CRYSTAL_2PIN, "Crystal", PartNumber=NX3215SA-32.768K-STD-MUA-9, Frequency=32.768KHz

## Via types
v1: diameter 20, hole 10, Top Layer to Bottom Layer, 130 vias
v2: diameter 25, hole 15, Top Layer to Bottom Layer, 26 vias
v3: diameter 22, hole 10, Top Layer to Bottom Layer, 7 vias

## Nets (pads, with @x,y where several pads share a name; then routed paths per layer and width w, separated by ;. In a path a pad name is that pad's centre, name@x,y a point inside that pad or via, vN(x,y) a via of type N, cw(c..) or ccw(c..) an arc to the next point about the centre after c; other vN are vias at no path point)
+3.3V: C1.1 C2.1 D1.3 D1.4 D2.3 D2.4 J2.4 PC01.1 PD01.1 R1.2 R2.2 R3.2 R4.2 R5.2 R6.2 TP1.1 U1.H3 U1.J3 | length 640.8
  Top Layer w8: v3(-100,-820) TP1.1@-100,-775 ; U1.J3@19.69,255.91 v1(39.37,236.22) U1.H3@59.06,255.91 v1(39.37,275.59) U1.J3@19.69,255.91
  Top Layer w12: v1(-357,-453) R5.2@-335,-453 R3.2@-300,-453 R6.2@-265,-453 R4.2@-230,-453 R2.2@-195,-453 ; v1(-195,-475) R2.2@-195,-453 ; R1.2@-160,-453 R2.2@-195,-453 ; D1.4@163.27,567.56 D1.3@191.54,567.56 ; D1.3@196.73,567.56 D2.4@268.27,567.56 D2.3@296.54,567.56 ; D2.3@301.73,567.56 v2(335,567.56)
  Top Layer w16: C2.1@-314.96,-1281.96 v2@-314.96,-1251.97 ; J2.4@-5.41,-1334.07 v2(-5.41,-1290) ; C1.1@315.08,-1281.92 v2@315.08,-1251.93
  other v2: -314.96,-1255 315.08,-1254.96
+VBAT: PC16.1 U1.K3 | length 981.9
  Top Layer w8: v1(-39.37,236.22) U1.K3@-19.69,255.91
  Bottom Layer w8: v1(-39.37,236.22) -39,235.85 -39,157.11 59.06,59.06 335.94,59.06 445,-50 PC16.1@750,-50
+VBST: PC18.1 U1.J8 U1.J9 | length 937.1
  Top Layer w8: U1.J8@19.69,59.06 v1(39.37,39.37) U1.J9@19.69,19.69 v1(39.37,0)
  Bottom Layer w16: v1(39.37,39.37) v1(39.37,0) 78.74,-39.37 236.22,-39.37 446.85,-250 PC18.1@750,-250
+VIN: C6.2 C7.2 C8.1 C9.1 L1.2 PA01.1 PB01.1 U1.G1 U1.G2 U1.G3 U1.H1 U1.H2 U1.H8 U1.H9 U1.L8 U1.L9 U1.M8 U1.M9 | length 751.2
  Top Layer w8: U1.M9@-98.43,19.69 v1(-78.74,39.37) ; U1.L9@-59.06,19.69 v1(-78.74,39.37) ; U1.H9@59.06,19.69 v1(78.74,39.37) U1.H8@59.06,59.06 v1(78.74,78.74) ; U1.H2@59.06,295.28 v1(78.74,314.96) ; U1.H1@59.06,334.65 v1(78.74,314.96) ; v1(118.11,236.22) U1.G3@98.43,255.91 v1(118.11,275.59) U1.G2@98.43,295.28 ; v1(-78.74,39.37) U1.M8@-98.43,59.06 v1(-78.74,78.74) U1.L8@-59.06,59.06 v1(-78.74,39.37) ; v1(78.74,314.96) U1.G1@98.43,334.65 v1(118.11,314.96) U1.G2@98.43,295.28 ; v1(78.74,314.96) U1.G2@98.43,295.28
  Top Layer w16: v2@-330,1249.97 C9.1@-330,1290 ; v2@-270,1249.97 C9.1@-270,1290 ; v2@-195,1107.01 C6.2@-195,1137 ; v2@144.96,1106.97 L1.2@144.96,1136.96 ; v2@194.96,1106.97 C7.2@194.96,1136.96 ; v2@270,1249.97 C8.1@270,1290 ; v2@330,1249.97 C8.1@330,1290
  other v2: -195,1110.04 144.96,1110 194.96,1110 -330,1253 -270,1253 270,1253 330,1253
+VLDO2: PC15.1 U1.G4 | length 720.6
  Top Layer w8: U1.G4@98.43,216.54 v1(118.11,196.85)
  Bottom Layer w8: v1(118.11,196.85) 216.54,98.43 356.57,98.43 405,50 PC15.1@750,50
+VSW: PC17.1 U1.G9 U1.G10 | length 789.1
  Top Layer w8: U1.G10@98.43,-19.69 v1(118.11,0) ; U1.G9@98.43,19.69 v1(118.11,39.37)
  Bottom Layer w16: v1(118.11,39.37) v1(118.11,0) 325,0 475,-150 PC17.1@750,-150
\LED1_GRN: R12.1 U1.D2 | length 146.2
  Top Layer w5: R12.1@196.73,417 196.73,395.27 236.22,355.78 236.22,314.96 U1.D2@216.54,295.28
\LED1_RED: R11.1 U1.D1 | length 104.9
  Top Layer w5: R11.1@162,417 162,389.18 U1.D1@216.54,334.65
\LED2_GRN: R10.1 U1.C2 | length 140.8
  Top Layer w5: U1.C2@255.91,295.28 275.59,314.96 275.59,368.59 302,395 R10.1@302,417
\LED2_RED: R9.1 U1.C1 | length 86.9
  Top Layer w5: U1.C1@255.91,334.65 255.91,382.91 267,394 R9.1@267,417
\PONKEY: PC14.1 U1.D3 | length 623.5
  Top Layer w5: U1.D3@216.54,255.91 236.22,236.22 v1(236.22,157.48)
  Bottom Layer w5: v1(236.22,157.48) 379.52,157.48 387,150 PC14.1@750,150
\RESET: PD02.1 R7.1 R8.2 TP1.10 U1.M3 | length 2914.3
  Top Layer w5: TP1.10@-100,-725 -100,-630 -50,-580 -50,-525 25,-450 v1(55,-450) ; U1.M3@-98.43,255.91 v1(-78.74,236.22) ; v1(57.31,395) R7.1@57.31,417 R8.2@92,417
  Bottom Layer w5: v1(55,-450) 55,-291.22 -19.68,-216.54 -19.68,78.74 -78.74,137.8 v1(-78.74,236.22) -19.68,295.28 -19.68,318.01 v1(57.31,395) 57.31,677.69 35,700 35,901 74,940 340,940 700,1300 800,1300 PD02.1@850,1350
\SDDET: J2.11 U1.H17 | length 969.1
  Top Layer w5: U1.H17@59.06,-295.28 39.37,-314.96 39.37,-385.83 300,-646.46 300,-1060 264.8,-1095.2 J2.11@226.28,-1095.2
\TRST: TP1.9 U1.R11 | length 764.6
  Top Layer w5: v1(-236.22,-78.74) U1.R11@-216.54,-59.06
  Top Layer w8: TP1.9@-50,-725 v3(-50,-680)
  Bottom Layer w5: v1(-236.22,-78.74) -236.22,-196.85 -216.54,-216.54 -216.54,-303.46 -133.86,-386.14 -133.86,-483.86 -150,-500 -150,-580 v3(-50,-680)
ANA0: PA02.1 U1.L1 | length 1579
  Top Layer w5: PA02.1@-850,1350 -800,1300 -730,1300 -620,1190 -620,920 -305,605 -49.88,605 -4,559.12 -4,389.7 U1.L1@-59.06,334.65
ANA1: PB02.1 U1.L2 | length 1545.4
  Top Layer w5: PB02.1@-750,1350 -600,1200 -600,930 -295,625 -45,625 10.98,569.02 10.98,387.98 -40,337 -40,314.33 U1.L2@-59.06,295.28
BOOT0: S2.8 U1.J6 | length 1188.1
  Top Layer w5: S2.8@-300,995 -300,945 -155,800 v1(65,800) ; U1.J6@19.69,137.8 v1(39.37,157.48)
  Bottom Layer w5: v1(39.37,157.48) 19.68,177.17 19.68,322.83 84,387.15 84,781 v1(65,800)
BOOT1: S2.7 U1.H6 | length 1160.9
  Top Layer w5: S2.7@-250,995 -250,945 -145,840 v1(65,840) ; U1.H6@59.06,137.8 v1(78.74,157.48)
  Bottom Layer w5: v1(65,840) 103,802 103,370.72 59.06,326.77 59.06,177.17 v1(78.74,157.48)
BOOT2: S2.6 U1.G6 | length 1132.5
  Top Layer w5: S2.6@-200,995 -200,945 -135,880 v1(65,880) ; U1.G6@98.43,137.8 v1(118.11,157.48)
  Bottom Layer w5: v1(65,880) 122.05,822.95 122.05,357.05 100,335 100,175.59 v1(118.11,157.48)
EEPROM_WP: S2.4 U1.P4 | length 589.8
  Top Layer w5: U1.P4@-177.17,216.54 v1(-157.48,236.22)
  Top Layer w12: S2.4@-150,705 v1(-150,745)
  Bottom Layer w5: v1(-157.48,236.22) -137.8,255.91 -137.8,401.57 -150,413.78 v1(-150,745)
GND: C1.2 C2.2 C3.2 C4.2 C5.1 C6.1 C7.1 C8.2 C9.2 C10.1 D3.3 D3.4 J1.4 J1.5 J2.6 J2.9 J2.10 PA29.1 PA30.1 PD29.1 PD30.1 PGND.1 R13.1 S1.2 S2.5 TP1.3 U1.D4 U1.E4 U1.E5 U1.E6 U1.E7 U1.E8 U1.E9 U1.E10 U1.E11 U1.E12 U1.E13 U1.E14 U1.E15 U1.F4 U1.F5 U1.F6 U1.F7 U1.F8 U1.F9 U1.F10 U1.F11 U1.F12 U1.F13 U1.F14 U1.F15 U1.G5 U1.G11 U1.G12 U1.G13 U1.G14 U1.G15 U1.H5 U1.H13 U1.H14 U1.H15 U1.J1 U1.J5 U1.J13 U1.J14 U1.J15 U1.J16 U1.K5 U1.K13 U1.K14 U1.K15 U1.K16 U1.L5 U1.L13 U1.L14 U1.L15 U1.M5 U1.M10 U1.M11 U1.M12 U1.M13 U1.M14 U1.M15 U1.N5 U1.N6 U1.N7 U1.N8 U1.N9 U1.N10 U1.N11 U1.N12 U1.N13 U1.N14 U1.N15 U1.P5 U1.P6 U1.P7 U1.P8 | length 5128.9
  Top Layer w5: U1.J1@19.69,334.65 v1(39.37,314.96)
  Top Layer w6: v2@-25.59,1260.59 J1.4@-25.59,1312.01
  Top Layer w8: U1.P6@-177.17,137.8 v1(-157.48,118.11) ; U1.P6@-177.17,137.8 -157.48,157.48 ; U1.P5@-177.17,177.17 -157.48,157.48 ; U1.N15@-137.8,-216.54 -118.11,-196.85 ; U1.N6@-137.8,137.8 v1(-118.11,157.48) ; U1.M10@-98.43,-19.69 v1(-118.11,-39.37) ; U1.M5@-98.43,177.17 v1(-118.11,157.48) ; U1.L5@-59.06,177.17 U1.K5@-19.69,177.17 v1(0,157.48) U1.J5@19.69,177.17 v1(39.37,196.85) U1.H5@59.06,177.17 U1.G5@98.43,177.17 U1.F5@137.8,177.17 ; v2@-25.59,1260.59 -25,1260 ; U1.K16@-19.69,-255.91 0,-236.22 ; v3(0,-820) TP1.3@0,-775 ; U1.J16@19.69,-255.91 0,-236.22 ; U1.G11@98.43,-59.06 v1(118.11,-78.74) ; U1.F6@137.8,137.8 v1(157.48,118.11) ; U1.F6@137.8,137.8 157.48,157.48 ; U1.F4@137.8,216.54 v1(157.48,196.85) ; U1.E15@177.17,-216.54 v1(157.48,-196.85) ; U1.D4@216.54,216.54 U1.E4@177.17,216.54 v1(157.48,196.85) ; v1(-157.48,39.37) U1.N8@-137.8,59.06 v1(-157.48,78.74) ; v1(-157.48,39.37) U1.N9@-137.8,19.69 U1.N10@-137.8,-19.69 v1(-118.11,-39.37) ; v1(-157.48,39.37) U1.P8@-177.17,59.06 v1(-157.48,78.74) ; v1(-157.48,78.74) U1.P7@-177.17,98.43 v1(-157.48,118.11) ; v1(-157.48,78.74) U1.N7@-137.8,98.43 v1(-157.48,118.11) ; v1(-157.48,118.11) U1.N6@-137.8,137.8 -157.48,157.48 ; -157.48,157.48 U1.N5@-137.8,177.17 v1(-118.11,157.48) ; -118.11,-196.85 U1.M15@-98.43,-216.54 -78.74,-196.85 ; -118.11,-196.85 U1.M14@-98.43,-177.17 ; -118.11,-196.85 U1.N14@-137.8,-177.17 -118.11,-157.48 ; -118.11,-157.48 U1.M14@-98.43,-177.17 ; -118.11,-157.48 U1.M13@-98.43,-137.8 ; -118.11,-157.48 U1.N13@-137.8,-137.8 -118.11,-118.11 ; -118.11,-118.11 U1.M13@-98.43,-137.8 ; -118.11,-118.11 U1.M12@-98.43,-98.43 ; -118.11,-118.11 U1.N12@-137.8,-98.43 v1(-118.11,-78.74) ; v1(-118.11,-78.74) U1.M12@-98.43,-98.43 ; v1(-118.11,-78.74) U1.M11@-98.43,-59.06 v1(-118.11,-39.37) ; v1(-118.11,-78.74) U1.N11@-137.8,-59.06 v1(-118.11,-39.37) ; U1.M14@-98.43,-177.17 v1(-78.74,-157.48) ; U1.M14@-98.43,-177.17 -78.74,-196.85 ; U1.M13@-98.43,-137.8 v1(-78.74,-118.11) ; U1.M13@-98.43,-137.8 v1(-78.74,-157.48) ; U1.M12@-98.43,-98.43 v1(-78.74,-118.11) ; -78.74,-196.85 U1.L14@-59.06,-177.17 ; -78.74,-196.85 U1.L15@-59.06,-216.54 v1(-39.37,-196.85) ; v1(-78.74,-157.48) U1.L13@-59.06,-137.8 ; v1(-78.74,-157.48) U1.L14@-59.06,-177.17 ; v1(-78.74,-118.11) U1.L13@-59.06,-137.8 ; U1.L14@-59.06,-177.17 v1(-39.37,-196.85) ; U1.L14@-59.06,-177.17 v1(-39.37,-157.48) ; U1.L13@-59.06,-137.8 v1(-39.37,-157.48) ; v1(-39.37,-196.85) U1.K15@-19.69,-216.54 ; v1(-39.37,-196.85) U1.K14@-19.69,-177.17 ; v1(-39.37,-157.48) U1.K14@-19.69,-177.17 ; v1(-39.37,-157.48) U1.K13@-19.69,-137.8 v1(0,-157.48) ; U1.K15@-19.69,-216.54 0,-236.22 ; U1.K15@-19.69,-216.54 v1(0,-196.85) ; U1.K14@-19.69,-177.17 v1(0,-196.85) ; U1.K14@-19.69,-177.17 v1(0,-157.48) ; 0,-236.22 U1.J15@19.69,-216.54 ; v1(0,-196.85) U1.J15@19.69,-216.54 ; v1(0,-196.85) U1.J14@19.69,-177.17 ; v1(0,-157.48) U1.J14@19.69,-177.17 ; v1(0,-157.48) U1.J13@19.69,-137.8 v1(39.37,-157.48) ; U1.J15@19.69,-216.54 v1(39.37,-196.85) ; U1.J14@19.69,-177.17 v1(39.37,-196.85) ; U1.J14@19.69,-177.17 v1(39.37,-157.48) ; v1(39.37,-196.85) U1.H15@59.06,-216.54 v1(78.74,-196.85) ; v1(39.37,-196.85) U1.H14@59.06,-177.17 ; v1(39.37,-157.48) U1.H14@59.06,-177.17 ; v1(39.37,-157.48) U1.H13@59.06,-137.8 v1(78.74,-157.48) ; U1.H14@59.06,-177.17 v1(78.74,-196.85) ; U1.H14@59.06,-177.17 v1(78.74,-157.48) ; v1(78.74,-196.85) U1.G15@98.43,-216.54 v1(118.11,-196.85) ; v1(78.74,-196.85) U1.G14@98.43,-177.17 ; v1(78.74,-157.48) U1.G14@98.43,-177.17 ; v1(78.74,-157.48) U1.G13@98.43,-137.8 ; U1.G14@98.43,-177.17 v1(118.11,-196.85) ; U1.G14@98.43,-177.17 v1(118.11,-157.48) ; U1.G13@98.43,-137.8 v1(118.11,-118.11) ; U1.G13@98.43,-137.8 v1(118.11,-157.48) ; v1(118.11,-196.85) U1.F15@137.8,-216.54 v1(157.48,-196.85) ; v1(118.11,-196.85) U1.F14@137.8,-177.17 ; v1(118.11,-157.48) U1.F14@137.8,-177.17 ; v1(118.11,-157.48) U1.F13@137.8,-137.8 ; v1(118.11,-118.11) U1.G12@98.43,-98.43 v1(118.11,-78.74) ; v1(118.11,-118.11) U1.F13@137.8,-137.8 ; v1(118.11,-118.11) U1.F12@137.8,-98.43 ; v1(118.11,-78.74) U1.F12@137.8,-98.43 ; v1(118.11,-78.74) U1.F11@137.8,-59.06 ; U1.F14@137.8,-177.17 v1(157.48,-196.85) ; U1.F14@137.8,-177.17 v1(157.48,-157.48) ; U1.F13@137.8,-137.8 v1(157.48,-118.11) ; U1.F13@137.8,-137.8 v1(157.48,-157.48) ; U1.F12@137.8,-98.43 v1(157.48,-118.11) ; U1.F12@137.8,-98.43 v1(157.48,-78.74) ; U1.F11@137.8,-59.06 157.48,-39.37 ; U1.F11@137.8,-59.06 v1(157.48,-78.74) ; U1.F5@137.8,177.17 v1(157.48,196.85) ; U1.F5@137.8,177.17 157.48,157.48 ; v1(157.48,-196.85) U1.E14@177.17,-177.17 v1(157.48,-157.48) ; v1(157.48,-157.48) U1.E13@177.17,-137.8 v1(157.48,-118.11) ; v1(157.48,-118.11) U1.E12@177.17,-98.43 v1(157.48,-78.74) ; v1(157.48,-78.74) U1.E11@177.17,-59.06 157.48,-39.37 ; 157.48,-39.37 U1.F10@137.8,-19.69 157.48,0 ; 157.48,-39.37 U1.E10@177.17,-19.69 157.48,0 ; 157.48,0 U1.F9@137.8,19.69 v1(157.48,39.37) ; 157.48,0 U1.E9@177.17,19.69 v1(157.48,39.37) ; v1(157.48,39.37) U1.F8@137.8,59.06 v1(157.48,78.74) ; v1(157.48,39.37) U1.E8@177.17,59.06 v1(157.48,78.74) ; v1(157.48,78.74) U1.F7@137.8,98.43 v1(157.48,118.11) ; v1(157.48,78.74) U1.E7@177.17,98.43 v1(157.48,118.11) ; v1(157.48,118.11) U1.E6@177.17,137.8 157.48,157.48 ; 157.48,157.48 U1.E5@177.17,177.17 v1(157.48,196.85)
  Top Layer w12: C4.2@-152,495 v1@-127,495 ; S2.5@-150,995 v1(-150,1035) ; v1(-126,496) C3.2@-101,496 ; S1.2@267.32,773.23 v1(267.32,809.65) ; v1(267.32,890.35) S1.2@267.32,926.77
  Top Layer w15: -51.18,1230 J1.5@-51.18,1312.01
  Top Layer w16: C9.2@-330,1410 v2@-330,1450.03 ; v2@-315.04,-1368.03 C2.2@-315.04,-1338.04 ; C9.2@-270,1410 v2@-270,1450.03 ; C6.1@-194.92,1193.08 v2@-194.92,1223.07 ; v2@-145.04,1106.97 R13.1@-145.04,1136.96 ; v2@-95.04,1106.97 C10.1@-95.04,1136.96 ; J2.6@-92.03,-1334.07 v2(-92.03,-1290) ; v2@94.96,1106.97 C5.1@94.96,1136.96 ; C7.1@195.04,1193.04 v2@195.04,1223.03 ; C8.2@270,1410 v2@270,1450.03 ; v2@315,-1367.99 C1.2@315,-1338 ; C8.2@330,1410 v2@330,1450.03
  other v1: 219.39,-1329.35 -226.28,-1321.18 226.28,-950.71 -144.49,-905.93 90.16,-905.93 -220,410 -30,410 -220,535 -30,535
  other v2: -315.04,-1365 315,-1364.96 -145.04,1110 -95.04,1110 -38,1110 94.96,1110 -194.92,1220.04 -38,1220 195.04,1220 -38,1260 -330,1447 -270,1447 270,1447 330,1447
NetC3_1: C3.1 U1.N1 Y1.2 | length 191.5
  Top Layer w5: U1.N1@-137.8,334.65 -86.61,385.83 -86.61,429.96 Y1.2@-76.57,440
  Top Layer w8: Y1.2@-76.57,440 -65,451.57 C3.1@-65,496
NetC4_1: C4.1 U1.N2 Y1.1 | length 221.1
  Top Layer w5: Y1.1@-181,446 -165,430 -165,353.98 -157.48,346.46 -157.48,314.96 U1.N2@-137.8,295.28
  Top Layer w8: C4.1@-187,496 -187,452 Y1.1@-181,446
NetC10_2: C10.2 J1.6 R13.2
NetD1_1: D1.1 R11.2 | length 59.4
  Top Layer w5: R11.2@162,453 D1.1@162,512.44
NetD1_2: D1.2 R12.2 | length 59.4
  Top Layer w5: R12.2@196.73,453 D1.2@196.73,512.44
NetD2_1: D2.1 R9.2 | length 59.4
  Top Layer w5: R9.2@267,453 D2.1@267,512.44
NetD2_2: D2.2 R10.2 | length 59.4
  Top Layer w5: R10.2@302,453 D2.2@302,512.44
NetD3_1: D3.1 J1.2 | length 125.4
  Top Layer w6: D3.1@19.68,1189.02 19.68,1264.68 25.59,1270.59 J1.2@25.59,1312.01
NetD3_2: D3.2 J1.3 | length 123
  Top Layer w6: D3.2@0,1189.02 J1.3@0,1312.01
NetR8_1: R8.1 S1.1 | length 511.3
  Top Layer w5: R8.1@92,453 92,611.68 182.68,702.36 S1.1@182.68,773.23 S1.1@182.68,926.77
NetU1_K1: U1.K1 U1.K2 | length 39.4
  Top Layer w5: U1.K2@-19.69,295.28 U1.K1@-19.69,334.65
NetU1_M1: U1.M1 U1.M2 | length 39.4
  Top Layer w5: U1.M2@-98.43,295.28 U1.M1@-98.43,334.65
PA1: PC20.1 U1.C16 | length 574.5
  Top Layer w5: U1.C16@255.91,-255.91 v1(275.59,-275.59)
  Bottom Layer w5: v1(275.59,-275.59) 450,-450 PC20.1@750,-450
PA2: PD24.1 U1.A15 | length 906.6
  Top Layer w5: U1.A15@334.65,-216.54 366.54,-216.54 445,-295 445,-435 570,-560 570,-640 730,-800 800,-800 PD24.1@850,-850
PA3: PD06.1 U1.A5 | length 1137.6
  Top Layer w5: U1.A5@334.65,177.17 352.17,177.17 485,310 485,755 730,1000 800,1000 PD06.1@850,950
PA4: PC25.1 U1.B16 | length 903.3
  Top Layer w5: U1.B16@295.28,-255.91 314.96,-275.59 350.59,-275.59 385,-310 385,-465 510,-590 510,-710 PC25.1@750,-950
PA5: PD25.1 U1.A16 | length 961
  Top Layer w5: U1.A16@334.65,-255.91 355.91,-255.91 405,-305 405,-455 530,-580 530,-700 730,-900 800,-900 PD25.1@850,-950
PA6: PC26.1 U1.B17 | length 943.1
  Top Layer w5: U1.B17@295.28,-295.28 315,-315 315,-455 470,-610 470,-770 PC26.1@750,-1050
PA7: PD22.1 U1.A12 | length 814.1
  Top Layer w5: U1.A12@334.65,-98.43 348.43,-98.43 525,-275 525,-395 730,-600 800,-600 PD22.1@850,-650
PA9: PB22.1 U1.U12 | length 813.7
  Top Layer w5: PB22.1@-750,-650 -595,-495 -595,-300 -373.74,-78.74 -314.96,-78.74 U1.U12@-295.28,-98.43
PA14: PD04.1 U1.B3 | length 1287.5
  Top Layer w5: U1.B3@295.28,255.91 314.96,275.59 353.59,275.59 425,347 425,895 730,1200 800,1200 PD04.1@850,1150
PA15: PB27.1 U1.T15 | length 1194.1
  Top Layer w5: PB27.1@-750,-1150 -475,-875 -475,-340 -371.22,-236.22 -275.59,-236.22 U1.T15@-255.91,-216.54
PB0: PD21.1 U1.A11 | length 759.7
  Top Layer w5: U1.A11@334.65,-59.06 359.06,-59.06 565,-265 565,-335 730,-500 800,-500 PD21.1@850,-550
PB1: PC11.1 U1.B11 | length 721.2
  Top Layer w5: U1.B11@295.28,-59.06 314.96,-39.37 355.63,-39.37 650,255 650,350 PC11.1@750,450
PB3: PA26.1 U1.V14 | length 1149.3
  Top Layer w5: PA26.1@-850,-1050 -800,-1000 -730,-1000 -520,-790 -520,-325 -372.17,-177.17 U1.V14@-334.65,-177.17
PB4: PB25.1 U1.U14 | length 1034.3
  Top Layer w5: PB25.1@-750,-950 -535,-735 -535,-320 -372.48,-157.48 -314.96,-157.48 U1.U14@-295.28,-177.17
PB5: PD20.1 U1.C17 | length 699.6
  Top Layer w5: U1.C17@255.91,-295.28 v1(275.59,-314.96)
  Bottom Layer w5: v1(275.59,-314.96) 460.63,-500 800,-500 PD20.1@850,-450
PB6: PC30.1 U1.H18 | length 1401.6
  Top Layer w5: U1.H18@59.06,-334.65 59.06,-376.06 350,-667 350,-1050 PC30.1@750,-1450
PB7: PA23.1 U1.V12 | length 928.8
  Top Layer w5: PA23.1@-850,-750 -800,-700 -730,-700 -580,-550 -580,-305 -373.43,-98.43 U1.V12@-334.65,-98.43
PB8: PB24.1 U1.T13 | length 916.9
  Top Layer w5: v1(-275.59,-157.48) U1.T13@-255.91,-137.8
  Bottom Layer w5: PB24.1@-750,-850 -650,-750 -650,-531.89 v1(-275.59,-157.48)
PB9: PB23.1 U1.U13 | length 874
  Top Layer w5: PB23.1@-750,-750 -565,-565 -565,-310 -373.11,-118.11 -314.96,-118.11 U1.U13@-295.28,-137.8
PB10: PC22.1 U1.A13 | length 700.7
  Top Layer w5: U1.A13@334.65,-137.8 362.8,-137.8 505,-280 505,-405 PC22.1@750,-650
PB11: PD10.1 U1.A9 | length 896.5
  Top Layer w5: U1.A9@334.65,19.69 354.68,19.68 605,270 605,475 730,600 800,600 PD10.1@850,550
PB12: PC23.1 U1.B14 | length 794.5
  Top Layer w5: U1.B14@295.28,-177.17 314.96,-196.85 371.85,-196.85 465,-290 465,-425 590,-550 590,-590 PC23.1@750,-750
PB13: PD23.1 U1.A14 | length 852.2
  Top Layer w5: U1.A14@334.65,-177.17 377.17,-177.17 485,-285 485,-415 610,-540 610,-580 730,-700 800,-700 PD23.1@850,-750
PB14: PA28.1 U1.T14 | length 1359.9
  Top Layer w5: v1(-275.59,-196.85) U1.T14@-255.91,-177.17
  Bottom Layer w5: PA28.1@-850,-1250 -800,-1200 -730,-1200 -625,-1095 -625,-546.26 v1(-275.59,-196.85)